# Altium PCB PowerDist.PcbDoc (part 2 of 2)
Units mm, origin at the board's own origin, x right, y up, seen from the top; angles counter-clockwise.
Board outline 126.62 x 74.17 mm, 2 copper layers (Top Layer, Bottom Layer); 124 components, 104 nets, 423 pads, 40 vias.
Unrouted connection lines stored in the file: 201.
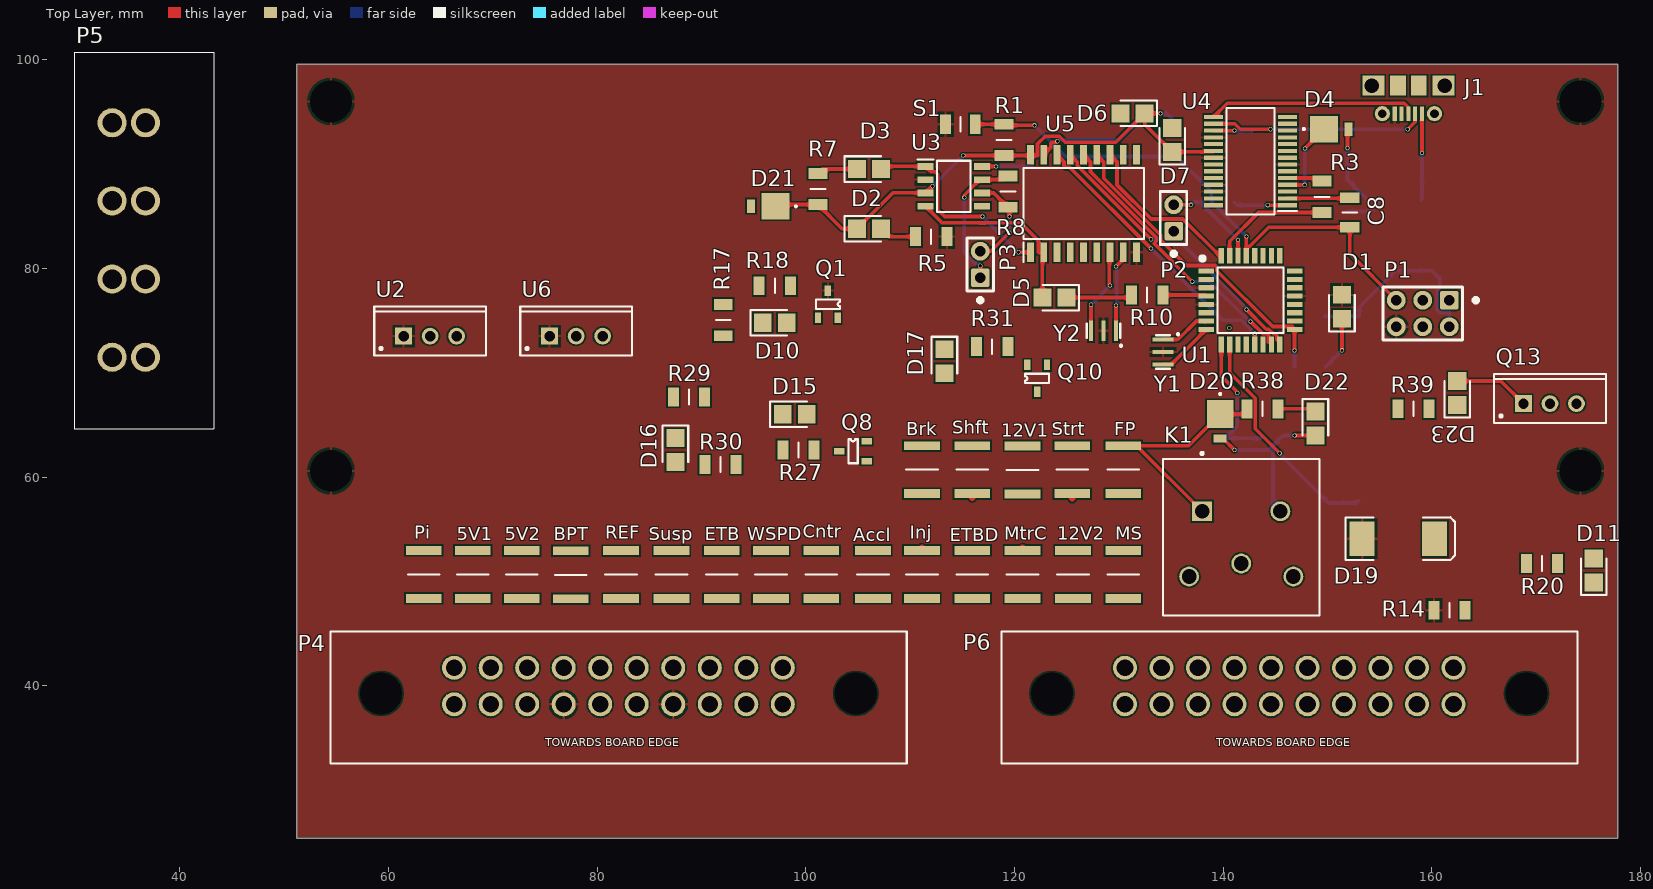
[diagram p0: Top Layer view]

## Part data (continued)
Pi: library part "Fuse 2", "Fuse", Case/Package=1812, Case Code (Metric)=4532, Current Rating=100A, Hold Current=500mA, Manufacturer=Bourns, Manufacturer Part Number=MF-MSMF050-2, Max Operating Temperature=85°C, Min Operating Temperature=-40°C, Operating Supply Voltage=15V, Package Quantity=2000, Power Dissipation=800mW, Resistance=150mR, Supplier Part Number=507-1881-2-ND, Trip Current=1A, Approvals=UL,CSA,TUV, Case Code (Imperial)=1812, ComponentLink1Description=https://datasheet.ciiva.com/326/mfmsmf-326354.pdf, ComponentLink1URL=https://datasheet.ciiva.com/326/mfmsmf-326354.pdf, ComponentLink2Description=https://datasheet.ciiva.com/1228/1786007-1228155.pdf, ComponentLink2URL=https://datasheet.ciiva.com/1228/1786007-1228155.pdf, ComponentLink3Description=https://datasheet.ciiva.com/16205/mfmsmf-16205994.pdf, ComponentLink3URL=https://datasheet.ciiva.com/16205/mfmsmf-16205994.pdf, ComponentLink4Description=https://datasheet.ciiva.com/34302/1164200-34302041.pdf, ComponentLink4URL=https://datasheet.ciiva.com/34302/1164200-34302041.pdf, ComponentLink5Description=https://datasheet.ciiva.com/14537/70153434-14537737.pdf, ComponentLink5URL=https://datasheet.ciiva.com/14537/70153434-14537737.pdf, ComponentLink6Description=https://datasheet.ciiva.com/46395/1695373-46395287.pdf, ComponentLink6URL=https://datasheet.ciiva.com/46395/1695373-46395287.pdf, ComponentLink7Description=https://datasheet.ciiva.com/22749/1695373-22749079.pdf, ComponentLink7URL=https://datasheet.ciiva.com/22749/1695373-22749079.pdf, ComponentLink8Description=https://datasheet.ciiva.com/32426/mf-msmf-series-eng-tds-32426126.pdf, ComponentLink8URL=https://datasheet.ciiva.com/32426/mf-msmf-series-eng-tds-32426126.pdf, ComponentLink9Description=https://datasheet.ciiva.com/4501/mfmsmf-72300-4501655.pdf, ComponentLink9URL=https://datasheet.ciiva.com/4501/mfmsmf-72300-4501655.pdf, ComponentLink10Description=https://datasheet.ciiva.com/3019/mfmsmf-3019622.pdf, ComponentLink10URL=https://datasheet.ciiva.com/3019/mfmsmf-3019622.pdf, ComponentLink11Description=https://datasheet.ciiva.com/3019/mfmsmf-3019621.pdf, ComponentLink11URL=https://datasheet.ciiva.com/3019/mfmsmf-3019621.pdf, ComponentLink12Description=https://datasheet.ciiva.com/326/mfmsmf-326356.pdf, ComponentLink12URL=https://datasheet.ciiva.com/326/mfmsmf-326356.pdf, ComponentLink13Description=https://datasheet.ciiva.com/1274/1786007-1274499.pdf, ComponentLink13URL=https://datasheet.ciiva.com/1274/1786007-1274499.pdf, ComponentLink14Description=https://datasheet.ciiva.com/326/mfmsmf-326355.pdf, ComponentLink14URL=https://datasheet.ciiva.com/326/mfmsmf-326355.pdf, ComponentLink15Description=https://datasheet.ciiva.com/1274/1786007-1274498.pdf, ComponentLink15URL=https://datasheet.ciiva.com/1274/1786007-1274498.pdf, ComponentLink16Description=https://datasheet.ciiva.com/15226/getdatasheetpartid-117168-15226886.pdf, ComponentLink16URL=https://datasheet.ciiva.com/15226/getdatasheetpartid-117168-15226886.pdf, ComponentLink17Description=https://datasheet.ciiva.com/25894/mfmsmf-25894175.pdf, ComponentLink17URL=https://datasheet.ciiva.com/25894/mfmsmf-25894175.pdf, Contact Plating=Gold, Height=0.85mm, LatestRevisionDate=17-Jul-2002, LatestRevisionNote="Re-released for DXP Platform.", Lead Free="Lead Free", Length=4.73mm, Max Current Rating=100A, Mount="Surface Mount,PCB", Number of Terminals=2, PackageDescription="Thru-Hole; 2 Leads", PackageReference=PIN-W2/E2.8, Packaging="Tape and Reel", part number=MF-MSMF050-2, Pricing 1="2000=0.2898, 4000=0.28463, 6000=0.27945, 10000=0.2691 (USD)", Published=8-Jun-2000, Publisher="Altium Limited", Radiation Hardening=No, REACH SVHC="No SVHC", Stock 1=126000, Supplier 1=Digi-Key, Terminal Material=Gold, Termination=SMD/SMT, Time to Trip=0.15s, Voltage Rating=15V, Voltage Rating (DC)=15V, Width=3.41mm
Q1 Q2 Q5 Q6 Q7 Q11 Q12: "N-Channel MOSFET", Supplier Part Number 1=SSM3K329RLFCT-ND, LatestRevisionDate=17-Jul-2002, LatestRevisionNote="Re-released for DXP Platform.", PackageDescription="TO, Flat Index; 3 In-Line, Axial Leads; Body Dia. 4.6mm; Lead Dia. 0.5 mm (max)", PackageReference=E3, PackageVersion=1995/1996, Published=8-Jun-2000, Publisher="Altium Limited", Supplier 1=Digi-Key
Q3 Q4 Q8 Q9 Q10: "P-Channel MOSFET", Supplier Part Number 1=DMP3099L-7DICT-ND, LatestRevisionDate=17-Jul-2002, LatestRevisionNote="Re-released for DXP Platform.", PackageDescription="TO, Flat Index; 3 In-Line, Axial Leads; Body Dia. 4.6mm; Lead Dia. 0.5 mm (max)", PackageReference=E3, PackageVersion=1995/1996, Published=8-Jun-2000, Publisher="Altium Limited", Supplier 1=Digi-Key
Q13: "P-Channel MOSFET", Supplier Part Number 1=IRF4905PBF-ND, LatestRevisionDate=17-Jul-2002, LatestRevisionNote="Re-released for DXP Platform.", PackageDescription="TO, Flat Index; 3 In-Line, Axial Leads; Body Dia. 4.6mm; Lead Dia. 0.5 mm (max)", PackageReference=E3, PackageVersion=1995/1996, Published=8-Jun-2000, Publisher="Altium Limited", Supplier 1=Digi-Key
R1: library part Res1, "Resistor", Case/Package=1206, Case Code (Metric)=3216, Manufacturer="Stackpole Electronics", Manufacturer Part Number=RNCP1206FTD1K00, Max Operating Temperature=155°C, Max Power Dissipation=500mW, Min Operating Temperature=-55°C, Resistance=10kR, Supplier Part Number=RNCP1206FTD10K0CT-ND, Temperature Coefficient=100ppm/°C, Tolerance=1%, Case Code (Imperial)=1206, ComponentLink1Description=http://www.seielect.com/Catalog/SEI-rncp.pdf, ComponentLink1URL=http://www.seielect.com/Catalog/SEI-rncp.pdf, ComponentLink2Description=https://www.seielect.com/catalog/SEI-Packaging.pdf, ComponentLink2URL=https://www.seielect.com/catalog/SEI-Packaging.pdf, Composition="Thin Film", Contact Plating=Nickel,Tin,Matte, Height=0.024inch, Lead Free="Lead Free", Length=0.122inch, Mount="Surface Mount", Number of Terminations=2, Packaging="Tape and Reel", Pricing 1="1=0.1, 10=0.052, 100=0.0211, 1000=0.00949, 2500=0.00824 (USD)", Radiation Hardening=No, Stock 1=679, Supplier 1=Digi-Key, Width=0.059inch
R2 R3 R4 R5 R7 R10 R11 R12: library part Res1, "Resistor", Case/Package=1206, Case Code (Metric)=3216, Manufacturer="Stackpole Electronics", Manufacturer Part Number=RNCP1206FTD1K00, Max Operating Temperature=155°C, Max Power Dissipation=500mW, Min Operating Temperature=-55°C, Resistance=1kR, Supplier Part Number=RMCF1206FT1K00CT-ND, Temperature Coefficient=100ppm/°C, Tolerance=1%, Case Code (Imperial)=1206, ComponentLink1Description=http://www.seielect.com/Catalog/SEI-rncp.pdf, ComponentLink1URL=http://www.seielect.com/Catalog/SEI-rncp.pdf, ComponentLink2Description=https://www.seielect.com/catalog/SEI-Packaging.pdf, ComponentLink2URL=https://www.seielect.com/catalog/SEI-Packaging.pdf, Composition="Thin Film", Contact Plating=Nickel,Tin,Matte, Height=0.024inch, Lead Free="Lead Free", Length=0.122inch, Mount="Surface Mount", Number of Terminations=2, Packaging="Tape and Reel", Pricing 1="1=0.1, 10=0.052, 100=0.0211, 1000=0.00949, 2500=0.00824 (USD)", Radiation Hardening=No, Stock 1=679, Supplier 1=Digi-Key, Width=0.059inch
R6: library part Res1, "Resistor", Case/Package=1206, Case Code (Metric)=3216, Manufacturer="TE Connectivity Holsworthy", Manufacturer Part Number=CRGH1206F16K9, Max Operating Temperature=125°C, Min Operating Temperature=-55°C, Number of Resistors=1, Power Rating=500mW, Resistance=16.9kR, Supplier Part Number=RMCF1206FT16K9CT-ND, Temperature Coefficient=100ppm/°C, Tolerance=1%, Voltage Rating=200V, Case Code (Imperial)=1206, ComponentLink1Description=https://datasheet.ciiva.com/12573/eng-ds-1773204-g-12573853.pdf, ComponentLink1URL=https://datasheet.ciiva.com/12573/eng-ds-1773204-g-12573853.pdf, Composition="Thick Film,Power resistor", ELV=Compliant, Height=0.55mm, Length=3.1mm, Mount="Surface Mount", Number of Terminations=2, Packaging="Tape and Reel", Supplier 1=Digi-Key, Termination=Solder, Width=1.55mm
R8: library part Res1, "Resistor", Case/Package=1206, Case Code (Metric)=3216, Manufacturer=Vishay, Manufacturer Part Number=CRCW1206120RFKEAHP, Max Operating Temperature=155°C, Min Operating Temperature=-55°C, Package Quantity=5000, Power Rating=500mW, Resistance=120R, Temperature Coefficient=100ppm/°C, Tolerance=1%, Voltage Rating=200V, Case Code (Imperial)=1206, ComponentLink1Description=https://datasheet.ciiva.com/8976/crcwhpe3-8976135.pdf, ComponentLink1URL=https://datasheet.ciiva.com/8976/crcwhpe3-8976135.pdf, ComponentLink2Description=https://datasheet.ciiva.com/48525/crcwhpe3-48525463.pdf, ComponentLink2URL=https://datasheet.ciiva.com/48525/crcwhpe3-48525463.pdf, ComponentLink3Description=https://datasheet.ciiva.com/7777/424479-7777433.pdf, ComponentLink3URL=https://datasheet.ciiva.com/7777/424479-7777433.pdf, ComponentLink4Description=https://datasheet.ciiva.com/7777/424479-7777434.pdf, ComponentLink4URL=https://datasheet.ciiva.com/7777/424479-7777434.pdf, Composition="Thick Film", Contact Plating=Tin, Depth=1.6mm, Height=0.5mm, Lead Free="Lead Free", Length=3.1mm, Military Standard=Not, Packaging="Tape and Reel", Radiation Hardening=No, REACH SVHC=Unknown, Stock 1=0, Supplier 1=Digi-Key, Supplier 2=Digi-Key, Termination=SMD/SMT, Voltage Rating (DC)=200V, Weight=0.000353oz, Width=1.6mm
R9: library part Res1, "Resistor", Case/Package=1206, Case Code (Metric)=3216, Manufacturer="Stackpole Electronics", Manufacturer Part Number=RNCP1206FTD10K0, Max Operating Temperature=155°C, Max Power Dissipation=500mW, Min Operating Temperature=-55°C, Resistance=10kR, Supplier Part Number=RNCP1206FTD10K0CT-ND, Temperature Coefficient=100ppm/°C, Tolerance=1%, Case Code (Imperial)=1206, ComponentLink1Description=http://www.seielect.com/Catalog/SEI-rncp.pdf, ComponentLink1URL=http://www.seielect.com/Catalog/SEI-rncp.pdf, Composition="Thin Film", Height=0.024inch, Length=0.122inch, Mount="Surface Mount", Number of Terminations=2, Packaging="Tape and Reel", Pricing 1="1=0.1, 10=0.052, 100=0.0211, 1000=0.00949, 2500=0.00824 (USD)", Stock 1=41487, Supplier 1=Digi-Key, Width=0.059inch
R13 R14 R18 R20 R21 R22 R23 R28 R30 R32: library part Res1, "Resistor", Supplier Part Number 1=RHM1.0MPCT-ND, LatestRevisionDate=17-Jul-2002, LatestRevisionNote="Re-released for DXP Platform.", PackageDescription="Axial Device, Thru-Hole; 2 Leads; 0.3 in Pin Spacing", PackageReference=AXIAL-0.3, Published=8-Jun-2000, Publisher="Altium Limited", Supplier 1=Digi-Key
R15 R16 R24: library part Res1, "Resistor", Case/Package=1206, Case Code (Metric)=3216, Manufacturer="Stackpole Electronics", Manufacturer Part Number=RNCP1206FTD1K00, Max Operating Temperature=155°C, Max Power Dissipation=500mW, Min Operating Temperature=-55°C, Resistance=10kR, Supplier Part Number=RNCP1206FTD1K00CT-ND, Temperature Coefficient=100ppm/°C, Tolerance=1%, Case Code (Imperial)=1206, ComponentLink1Description=http://www.seielect.com/Catalog/SEI-rncp.pdf, ComponentLink1URL=http://www.seielect.com/Catalog/SEI-rncp.pdf, ComponentLink2Description=https://www.seielect.com/catalog/SEI-Packaging.pdf, ComponentLink2URL=https://www.seielect.com/catalog/SEI-Packaging.pdf, Composition="Thin Film", Contact Plating=Nickel,Tin,Matte, Height=0.024inch, Lead Free="Lead Free", Length=0.122inch, Mount="Surface Mount", Number of Terminations=2, Packaging="Tape and Reel", Pricing 1="1=0.1, 10=0.052, 100=0.0211, 1000=0.00949, 2500=0.00824 (USD)", Radiation Hardening=No, Stock 1=679, Supplier 1=Digi-Key, Width=0.059inch
R17 R19 R27 R29 R31 R38 R39: library part Res1, "Resistor", Supplier Part Number 1=RNCP1206FTD511RCT-ND, LatestRevisionDate=17-Jul-2002, LatestRevisionNote="Re-released for DXP Platform.", PackageDescription="Axial Device, Thru-Hole; 2 Leads; 0.3 in Pin Spacing", PackageReference=AXIAL-0.3, Published=8-Jun-2000, Publisher="Altium Limited", Supplier 1=Digi-Key
R35: library part Res1, "Resistor", Supplier Part Number 1=RG3216P-1004-B-T1, LatestRevisionDate=17-Jul-2002, LatestRevisionNote="Re-released for DXP Platform.", PackageDescription="Axial Device, Thru-Hole; 2 Leads; 0.3 in Pin Spacing", PackageReference=AXIAL-0.3, Published=8-Jun-2000, Publisher="Altium Limited", Supplier 1=Digi-Key
R36 R37: library part Res1, "Resistor", Supplier Part Number 1=RG32P1.0MBCT-ND, LatestRevisionDate=17-Jul-2002, LatestRevisionNote="Re-released for DXP Platform.", PackageDescription="Axial Device, Thru-Hole; 2 Leads; 0.3 in Pin Spacing", PackageReference=AXIAL-0.3, Published=8-Jun-2000, Publisher="Altium Limited", Supplier 1=Digi-Key
S1: "Switch", Manufacturer="ITT C&K", Manufacturer Part Number=KXT331LHS, Supplier Part Number=CKN10779CT-ND, ComponentLink1Description=https://www.ckswitches.com/media/1465/kxt3.pdf, ComponentLink1URL=https://www.ckswitches.com/media/1465/kxt3.pdf, ComponentLink2Description=http://www.ckswitches.com/media/1465/kxt3.pdf, ComponentLink2URL=http://www.ckswitches.com/media/1465/kxt3.pdf, LatestRevisionDate=17-Jul-2002, LatestRevisionNote="Re-released for DXP Platform.", PackageDescription="Switch; 2 Leads", PackageReference=SPST-2, Pricing 1="8500=0.1264 (USD)", Published=24-Mar-1999, Publisher="Altium Limited", Stock 1=42500, Supplier 1=Digi-Key
U1: "8-bit AVR Microcontroller, 32KB Flash, 1KB EEPROM, 2KB SRAM, 32-pin TQFP, Industrial Grade (-40°C to 85°C)", Supplier Part Number=ATMEGA328P-AU-ND, Code_JEDEC=MS-026-ABA, ComponentLink1Description="Manufacturer Link", ComponentLink1URL=http://www.atmel.com/products/avr/default.asp?, ComponentLink2Description="ATmega48A/48PA/88A/88PA/168A/168PA/328/328P Datasheet", ComponentLink2URL=http://www.atmel.com/dyn/resources/prod_documents/8271.pdf, ComponentLink3Description="ATmega48A/48PA/88A/88PA/168A/168PA/328/328P Summary", ComponentLink3URL=http://www.atmel.com/dyn/resources/prod_documents/8271S.pdf, ComponentLink4Description="Atmel.com Home", ComponentLink4URL=http://www.atmel.com, DatasheetVersion="revA, Jan-2010", PackageDescription="32-Lead, 7x7x1.0 mm Body, 0.8mm Lead Pitch, Thin Profile Plastic Quad Flat Package (TQFP)", PackageReference=32A, PackageVersion="revB, Oct-2001", Published=1-Apr-2010, Publisher="Altium Limited", Supplier 1=Digi-Key, Supplier 2=Farnell, Supplier 3=Mouser, Supplier Part Number 2=1715486, Supplier Part Number 3=556-ATMEGA328P-AU
U2 U6: "3A Low Dropout Positive Regulators, 3-pin TO-220, Pb-Free", Manufacturer="National Semiconductor", PackageTopMarking=NSUZXYTTE#*LM1085*IT-5.0, PowerWise=N, ComponentLink1Description="Manufacturer URL", ComponentLink1URL=http://www.national.com/, ComponentLink2Description="LM1085 Datasheet", ComponentLink2URL=http://www.national.com/ds/LM/LM1085.pdf, ComponentLink3Description="LM1085 Web Page", ComponentLink3URL=http://www.national.com/pf/LM/LM1085.html, ComponentLink4Description="T03B Package Page", ComponentLink4URL=http://www.national.com/packaging/folders/t03b.html, CompType="LDO IC", DatasheetVersion=Jun-2005, High-Reliability=Y, PackageDescription="TO-220, Molded, 3 Lead, Straight", PackageReference=T03B, PackageVersion="revL, Jan-1992", PartNumber=LM1085IT-5.0/NOPB, PinCount=3, RoHS=Y
U3: "SOIC", Supplier Part Number=MCP2551T-E/SNCT-ND, Supplier 1=Digi-Key
U4: "USB UART Asynchronous Serial Data Transfer Chip, SSOP-28, Tape and Reel", Case/Package=SSOP, Manufacturer=FTDI, Manufacturer Part Number=FT232RL-REEL, Max Operating Temperature=85°C, Max Supply Voltage=5.25V, Min Operating Temperature=-40°C, Min Supply Voltage=3.3V, Operating Supply Current=15mA, Package Quantity=2000, Supplier Part Number=768-1007-1-ND, Voltage=5V, ComponentLink1Description="Manufacturer Link", ComponentLink1URL=http://www.ftdichip.com/Products/ICs/FT232R.htm, ComponentLink2Description=Datasheet, ComponentLink2URL=http://www.ftdichip.com/Support/Documents/DataSheets/ICs/DS_FT232R.pdf, ComponentLink3Description=https://datasheet.ciiva.com/34304/2161019-34304054.pdf, ComponentLink3URL=https://datasheet.ciiva.com/34304/2161019-34304054.pdf, ComponentLink4Description=https://datasheet.ciiva.com/1787/ds-ft232r-1787047.pdf, ComponentLink4URL=https://datasheet.ciiva.com/1787/ds-ft232r-1787047.pdf, ComponentLink5Description=https://datasheet.ciiva.com/1787/ds-ft232r-1787048.pdf, ComponentLink5URL=https://datasheet.ciiva.com/1787/ds-ft232r-1787048.pdf, ComponentLink6Description=https://datasheet.ciiva.com/1787/ds-ft232r-1787049.pdf, ComponentLink6URL=https://datasheet.ciiva.com/1787/ds-ft232r-1787049.pdf, ComponentLink7Description=https://datasheet.ciiva.com/4787/ds-ft232r-11534-4787658.pdf, ComponentLink7URL=https://datasheet.ciiva.com/4787/ds-ft232r-11534-4787658.pdf, ComponentLink8Description=https://datasheet.ciiva.com/15150/getdatasheetpartid-643207-15150506.pdf, ComponentLink8URL=https://datasheet.ciiva.com/15150/getdatasheetpartid-643207-15150506.pdf, ComponentLink9Description=https://datasheet.ciiva.com/16200/ds-ft232r-16200652.pdf, ComponentLink9URL=https://datasheet.ciiva.com/16200/ds-ft232r-16200652.pdf, ComponentLink10Description=https://datasheet.ciiva.com/26841/ft232rl-reel-26841080.pdf, ComponentLink10URL=https://datasheet.ciiva.com/26841/ft232rl-reel-26841080.pdf, Data Rate=12Mbps, DatasheetVersion="ver 2.07, Jul-2010", Height=1.75mm, Interface=RS-232,RS-422,RS-485,UART, Lead Free="Lead Free", Length=10.2mm, Mount="Surface Mount", Number of Channels=1, Number of Pins=28, Number of Transceivers=1, PackageDescription="28-Pin Small Outline Package 0.65 mm Pitch", PackageReference=SSOP-28, PackageVersion=2010, Packaging="Tape and Reel", Pricing 1="1=4.5, 10=4.05, 100=3.65, 250=3.25, 500=2.85002, 1000=2.65 (USD)", Published=19-Aug-2010, Publisher="Altium Limited", Radiation Hardening=No, REACH SVHC="No SVHC", Stock 1=216496, Supplier 1=Digi-Key, Supplier 2=Digi-Key, Weight=0.080001oz, Width=5.3mm
U5: "SOIC", Supplier Part Number=MCP2515T-I/SOCT-ND, Supplier 1=Digi-Key
Y1 Y2: Capacitance=15pF, Case/Package=SMD/SMT, Frequency=16MHz, Frequency Stability=0.15%, Frequency Tolerance=0.5%, Manufacturer=Murata, Manufacturer Part Number=CSTCE16M0V53C-R0, Max Operating Temperature=125°C, Min Operating Temperature=-40°C, Package Quantity=3000, Supplier Part Number=490-17948-1-ND, ComponentLink1Description=https://datasheet.ciiva.com/16430/cstce16m0v53c-r0-16430704.pdf, ComponentLink1URL=https://datasheet.ciiva.com/16430/cstce16m0v53c-r0-16430704.pdf, ComponentLink2Description=https://datasheet.ciiva.com/14132/ceralock-eng-bro-14132709.pdf, ComponentLink2URL=https://datasheet.ciiva.com/14132/ceralock-eng-bro-14132709.pdf, ComponentLink3Description=https://datasheet.ciiva.com/29617/l0430e-29617948.pdf, ComponentLink3URL=https://datasheet.ciiva.com/29617/l0430e-29617948.pdf, ComponentLink4Description=https://datasheet.ciiva.com/29617/l0430e-29617949.pdf, ComponentLink4URL=https://datasheet.ciiva.com/29617/l0430e-29617949.pdf, ComponentLink5Description=https://datasheet.ciiva.com/29617/l0430e-29617950.pdf, ComponentLink5URL=https://datasheet.ciiva.com/29617/l0430e-29617950.pdf, ComponentLink6Description=https://datasheet.ciiva.com/26812/getdatasheetpartid-418508-26812063.pdf, ComponentLink6URL=https://datasheet.ciiva.com/26812/getdatasheetpartid-418508-26812063.pdf, Composition=Ceramic, Contact Plating=Gold, Height=0.031inch, Lead Free="Lead Free", Length=0.126inch, Mount="Surface Mount", Number of Pins=3, Packaging="Tape and Reel", REACH SVHC="No SVHC", Stock 1=0, Supplier 1=Digi-Key, Termination=SMD/SMT, Tolerance=0.5%, Width=0.051inch

## Free pads (board coordinates)
  round 1.524 hole 4: 2(174.244,96.012) 3(54.483,96.012) 4(174.244,60.606) 5(54.483,60.606)

## Via types
v1: diameter 0.4, hole 0.3, Top Layer to Bottom Layer, 39 vias
v2: diameter 0.4, hole 0.3, Top Layer to Bottom Layer, tented both sides, 1 vias

## Nets (pads, with @x,y where several pads share a name; then routed paths per layer and width w, separated by ;. In a path a pad name is that pad's centre, name@x,y a point inside that pad or via, vN(x,y) a via of type N, cw(c..) or ccw(c..) an arc to the next point about the centre after c; other vN are vias at no path point)
5VOut: 5V1.1 5V2.1 Accl.1 BPT.1 C4.1 Cntr.1 ETB.1 REF.1 Susp.1 U6.2 WSPD.1
+3.3V: C7.2 U4.17 | length 3.7
  Top Layer w0.35: U4.17 v1(141.097,93.222)
  Bottom Layer w0.35: v1(141.097,93.222) 142.64,93.222 C7.2
+5V: C1.1 C2.2 C5.2 C6.2 D2.1 D4.2 D6.1 D7.1 D21.2 P1.4 R1.1 R7.1 R9.2 R10.2 U1.4 U1.6 U1.18 U3.3 U4.4 U4.20 U5.18 | length 85.2
  Top Layer w0.35: D21.2 97.244,86.13 R7.1 103.468,83.82 D2.1 108.324,87.249 U3.3 112.096,87.884 v1(112.141,87.884) ; v1(115.086,90.829) R1.1 122.209,90.829 122.209,91.947 122.939,92.677 124.3,92.677 124.869,92.108 129.707,92.108 D6.1 ; v1(133.985,94.869) D6.1 ; R10.2 138.263,77.47 U1.4 ; U4.20 138.978,91.179 D7.1 132.468,93.839 D6.1 ; U4.4 v1(147.817,88.022) ; v1(147.828,91.504) D4.2
  Bottom Layer w0.35: v1(112.141,87.884) v1(115.086,90.829) ; v1(133.985,94.869) 134.596,94.869 R9.2 ; v1(147.817,88.022) 147.817,91.238 147.955,91.376 v1(147.828,91.504) ; C1.1 C2.2 153.035,76.282 C6.2 C5.2 160.789,79.023 160.789,78.137 160.496,77.844 160.496,76.08 160.789,75.787 161.671,75.787 P1.4
ADC0: U1.23
ADC1: U1.24
ADC2: U1.25
ADC3: U1.26
ADC4: U1.27
ADC5: U1.28
ADC6: U1.19
ADC7: U1.22
CANH: P3.1 R8.1 U3.7 | length 13.6
  Top Layer w0.35: v1(115.189,86.823) 115.189,87.029 116.679,88.519 U3.7 119.027,88.519 R8.1 ; P3.1 v1(116.713,80.264)
  Bottom Layer w0.35: v1(115.189,86.823) 115.189,81.523 116.226,80.486 116.491,80.486 v1(116.713,80.264)
CANL: P3.2 R8.2 U3.6 | length 9.1
  Top Layer w0.35: P3.2 117.729,81.661 v1(119.507,83.439) ; U3.6 118.003,87.249 R8.2 119.507,85.745 v1(119.507,84.991)
  Bottom Layer w0.35: v1(119.507,83.439) v1(119.507,84.991)
CBRB: ETBD.1 Inj.1 MS.1 MtrC.1 P4.10 P4.20 P6.16 P6.18 Shft.1 Strt.1 | length 1.3
  Top Layer w0.65: Inj.1 Inj.1@111.125,53.213 ; Shft.1@115.951,58.039 Shft.1 ; MtrC.1 MtrC.1@120.777,53.213 ; 125.537,57.973 Strt.1
D0/RXD: P2.2 R2.1 U1.30 | length 9.5
  Top Layer w0.35: P2.2 v1(136.906,86.106) ; U1.30 v1(141.421,82.734)
  Bottom Layer w0.35: v1(136.906,86.106) 137.16,86.36 R2.1 138.073,86.082 v1(141.421,82.734)
D1/TXD: P2.1 R3.1 U1.31 | length 11.4
  Top Layer w0.35: U1.31 140.621,82.606 143.383,85.368 R3.1
D2/INTCAN: U1.32 U5.12 | length 16
  Top Layer w0.35: U5.12 129.829,90.238 129.829,88.016 133.104,84.741 136.137,84.741 139.666,81.212 U1.32
D9/CS: U1.13 U5.16 | length 27.3
  Top Layer w0.35: U5.16 124.749,90.238 124.749,89.869 124.91,89.708 125.279,89.708 v1(133.072,81.915) ; U1.13 v1(143.021,73.768)
  Bottom Layer w0.35: v1(133.072,81.915) 139.93,75.057 141.732,75.057 v1(143.021,73.768)
D11/MOSI: P1.5 U1.15 U5.14 | length 27.3
  Top Layer w0.35: U5.14 127.289,90.238 127.289,89.283 133.571,83.001 133.571,82.607 133.382,82.418 133.382,82.391 v1(137.033,78.74) ; v1(142.621,74.93) 143.814,73.737 144.185,73.737 144.346,73.576 144.346,72.93 144.621,72.93 U1.15
  Bottom Layer w0.35: v1(137.033,78.74) 138.685,78.74 142.391,75.034 142.621,75.034 v1(142.621,74.93)
D12/MISO: P1.1 U1.16 U5.15 | length 28.1
  Top Layer w0.35: U5.15 126.019,90.238 126.019,89.869 132.6,83.288 132.612,83.288 v1(133.096,82.804) ; v1(142.24,76.073) 144.126,74.187 144.371,74.187 144.796,73.762 144.796,73.737 144.985,73.737 145.146,73.576 145.146,73.167 U1.16@145.421,72.892
  Bottom Layer w0.35: v1(133.096,82.804) 133.96,82.804 134.373,82.391 136.049,82.391 142.24,76.2 v1(142.24,76.073)
D13/SCK: P1.2 R4.2 U1.17 U5.13 | length 30.9
  Top Layer w0.35: U5.13 128.559,90.238 128.559,88.649 134.021,83.187 134.021,82.743 136.477,80.287 139.235,80.287 139.396,80.126 139.396,79.799 144.758,74.437 146.596,74.437 U1.17 146.836,74.127 v1(146.836,72.136)
  Bottom Layer w0.35: R4.2 v1(146.836,72.136)
GND: C1.2 C2.1 C3.1 C4.2 C5.1 C6.1 C7.1 C9.1 C10.1 C11.2 C12.2 C13.2 C14.2 C15.2 C16.2 D1.2 D8.1 D9.1 D12.1 D13.1 D14.1 D19.1 J1.5 P1.6 P4.14 P4.17 pad.2 pad.3 pad.4 pad.5 Q1.3 Q2.3 Q5.3 Q6.3 Q7.3 Q11.3 Q12.3 R5.2 R6.1 R13.1 R14.1 R15.1 R16.1 R21.1 R22.1 R23.1 R24.1 R35.1 R36.1 S1.2 U1.3 U1.5 U1.21 U2.1 U3.2 U4.7 U4.18 U4.21 U4.25 U4.26 U5.9 U6.1 Y1.2 Y2.2
Net5VSpr1_2: 5V1.2 P4.2
Net5VSpr2_2: 5V2.2 P4.12
Net12VSpr1_1: 12V1.1 Q8.3 R27.1 R28.2
Net12VSpr2_1: 12V2.1 P6.9
NetACCL_2: Accl.2 P4.15 P4.16
NetBPT_2: BPT.2 P4.4
NetBRKLTVIN_1: Brk.1 Q10.3 R31.1 R32.2
NetC3_2: C3.2 U1.20
NetC8_1: C8.1 U4.2 | length 6
  Top Layer w0.35: U4.2 152.08,86.722 C8.1
NetC11_1: C11.1 D8.2 P6.1 Q3.1@104.582,75.408 R15.2
NetC12_1: C12.1 D9.2 P6.19 Q4.1@166.436,48.798 R16.2
NetC13_1: C13.1 C15.1 P4.3 U2.3 U6.3
NetC14_1: C14.1 D12.2 P6.7 Q8.1@105.821,61.534 R24.2
NetCntrllr_2: Cntr.2 D21.1
NetD1_1: D1.1 R4.1 | length 5.2
  Top Layer w0.35: v1(151.384,72.16) D1.1
  Bottom Layer w0.35: R4.1 v1(151.384,72.16)
NetD2_2: D2.2 R5.1 | length 3.6
  Top Layer w0.35: D2.2 107.957,83.058 R5.1
NetD3_1: D3.1 R7.2 | length 3.9
  Top Layer w0.35: R7.2 101.563,89.535 D3.1
NetD3_2: D3.2 U3.1 U5.1 | length 19.8
  Top Layer w0.35: D3.2 107.456,89.789 U3.1 111.977,89.273 112.401,89.273 112.653,89.022 112.653,85.642 113.303,84.991 v1(116.939,84.991) ; v1(120.372,81.558) U5.1
  Bottom Layer w0.35: v1(116.939,84.991) v1(120.372,81.558)
NetD5_1: D5.1 R10.1 | length 6.7
  Top Layer w0.35: D5.1@125.229,77.47 D5.1 130.961,77.216 R10.1
NetD5_2: D5.2 U3.4 U5.2 | length 18.2
  Top Layer w0.35: U3.4 113.053,84.387 116.653,84.387 116.678,84.362 117.2,84.362 117.225,84.387 120.567,84.387 122.293,82.661 122.293,81.558 U5.2 122.675,81.424 D5.2
NetD6_2: D6.2 R11.2
NetD7_2: D7.2 R12.2
NetD10_1: D10.1 R17.2
NetD10_2: D10.2 Q1.1@101.158,75.281 Q3.2 R18.1
NetD11_1: D11.1 R19.2
NetD11_2: D11.2 Q2.1@172.146,51.786 Q4.2 R20.1
NetD13_2: D13.2 P6.5 Q9.1@96.586,63.276
NetD14_2: D14.2 P6.4 Q10.1@123.124,70.769
NetD15_1: D15.1 R27.2
NetD15_2: D15.2 Q5.1@103.063,65.054 Q8.2 R28.1
NetD16_1: D16.1 R29.2
NetD16_2: D16.2 Q6.1@90.013,65.725 Q9.2 R30.1
NetD17_1: D17.1 R31.2
NetD17_2: D17.2 Q7.1@120.971,73.853 Q10.2 R32.1
NetD19_2: D19.2 P6.6 Q13.2
NetD20_1: D20.1 D22.2 K1.2 Q11.1@145.476,63.724 | length 17.2
  Top Layer w0.35: D20.1 140.004,63.689 v1(141.082,62.611) ; v1(146.852,64.001) D22.2
  Bottom Layer w0.35: v1@141.073,62.611 v1(141.082,62.611) 144.363,62.611 144.78,63.028 ; K1.2 144.78,56.729 144.78,63.028 ; v1(146.852,64.001) 145.753,64.001 145.476,63.724 144.78,63.028
NetD20_2: D20.2 FP.1 K1.1 R38.1 | length 22.2
  Top Layer w0.35: FP.1 FP.1@131.691,63.02 ; K1.1 FP.1@131.691,63.02 ; R38.1 141.756,66.04 D20.2 136.68,63.02 FP.1@131.691,63.02
NetD22_1: D22.1 R38.2 | length 3.7
  Top Layer w0.35: R38.2 148.597,66.548 D22.1
NetD23_1: D23.1 R39.2
NetD23_2: D23.2 Q12.1@154.874,57.755 Q13.1 R37.1 | length 7.2
  Top Layer w0.35: D23.2 166.617,69.222 Q13.1
NetETB_2: ETB.2 P6.2
NetETBDrv_2: ETBD.2 P6.14
NetF1_2: F1.2 J1.1 | length 8.2
  Top Layer w0.35: v1(159.05,91.059) J1.1
  Bottom Layer w0.35: F1.2 159.05,86.679 v1(159.05,91.059)
NetInj_2: Inj.2 P6.12
NetK1_3: K1.3 P6.3
NetK1_5: K1.5 P6.8
"NetMABX REF_2": P4.11 REF.2
NetMS_2: MS.2 P6.10
"NetMtr Cntrl_2": MtrC.2 P6.13
NetP4_1: P4.1 Pi.2
NetP4_5: P4.5 P4.6 Susp.2
NetP4_8: P4.8 P4.9 P4.18 P4.19 WSPD.2
NetP5_1: P5.1
NetP5_2: P5.2
NetP5_3: P5.3
NetP5_4: P5.4
NetP6_11: P6.11 Q13.3 R37.2 R39.1
NetQ3_3: Q3.3 Q4.3 R17.1 R18.2 R19.1 R20.2 Shft.2
NetQ9_3: Q9.3 R29.1 R30.2 Strt.2
NetR6_2: R6.2 U3.8 | length 4.8
  Top Layer w0.35: U3.8 116.889,89.793 v1(118.233,89.793)
  Bottom Layer w0.35: v1(118.233,89.793) 121.591,89.793 R6.2
NetR9_1: R9.1 U5.17 | length 10.9
  Top Layer w0.35: U5.17 123.479,91.578 123.479,91.947 123.64,92.108 124.009,92.108 v1(124.103,92.202)
  Bottom Layer w0.35: v1(124.103,92.202) 124.244,92.343 130.086,92.343 R9.1
NetR11_1: R11.1 U4.23
NetR12_1: R12.1 U4.22
NetU1_7: U1.7 Y1.1 | length 5
  Top Layer w0.35: Y1.1 135.686,73.209 137.439,74.962 U1.7 U1.7@138.25,74.841
NetU1_8: U1.8 Y1.3 | length 5.5
  Top Layer w0.35: Y1.3 135.018,70.809 U1.8
NetU5_7: U5.7 Y2.3 | length 7.8
  Top Layer w0.35: Y2.3 v1(127.324,76.524) ; v1(129.159,78.359) 129.095,78.423 129.095,80.962 U5.7@129.159,81.026
  Bottom Layer w0.35: v1(127.324,76.524) v1(129.159,78.359)
NetU5_8: U5.8 Y2.1 | length 7.2
  Top Layer w0.35: Y2.1 v1(129.724,76.467) ; v1(129.724,80.194) U5.8@130.429,80.899
  Bottom Layer w0.35: v1(129.724,76.467) 129.788,76.531 129.788,80.13 v1(129.724,80.194)
PD3: Q2.2 R14.2 U1.1
PD4: Q1.2 R13.2 U1.2
PD5: Q11.2 R35.2 U1.9 | length 13.7
  Top Layer w0.35: U1.9 139.821,69.699 141.351,68.169 v1(141.351,68.082)
  Bottom Layer w0.35: R35.2 R35.2@140.178,63.724 ; v1(141.351,68.082) 141.361,68.072 141.361,64.907 R35.2@140.178,63.724 ; Q11.2 R35.2@140.178,63.724
PD6: Q12.2 R36.2 U1.10 | length 22.1
  Top Layer w0.35: U1.10 140.621,70.005 143.064,67.562 143.064,64.644 v1(145.415,62.293)
  Bottom Layer w0.35: v1(145.415,62.293) 145.415,62.23 150.114,57.531 R36.2 152.75,57.531 Q12.2
PD7: Q7.2 R23.2 U1.11
PD8: Q6.2 R22.2 U1.12
PD10: Q5.2 R21.2 U1.14
PiReg: C16.1 Pi.1 U2.2
RBRB: 12V1.2 12V2.2 Brk.2 FP.2 P4.7 P4.13 P6.15 P6.17
RESET: C8.2 P1.3 R1.2 S1.1 U1.29 | length 52.5
  Top Layer w0.35: S1.1 R1.2 119.102,93.726 v1(121.92,93.726) ; U1.29 U1.29@142.221,81.801 ; v1(142.221,83.077) U1.29@142.221,81.801 ; P1.3 152.146,81.407 C8.2 144.368,83.948 U1.29@142.221,81.801
  Bottom Layer w0.35: v1(121.92,93.726) 121.907,93.726 124.89,90.743 135.504,90.743 138.873,87.374 138.873,86.425 v1(142.221,83.077)
RXD: R2.2 U4.1 | length 5.2
  Top Layer w0.35: v1(144.272,86.072) U4.1
  Bottom Layer w0.35: R2.2 141.361,86.072 v1(144.272,86.072)
TXD: R3.2 U4.5 | length 3.4
  Top Layer w0.35: U4.5 149.175,88.672 R3.2
USBD+: J1.3 U4.15 | length 20
  Top Layer w0.35: U4.15 140.385,95.836 157.364,95.836 157.75,95.45 J1.3
USBD-: J1.2 U4.16 | length 20.6
  Top Layer w0.35: U4.16 141.119,93.872 141.646,93.345 v1(144.526,93.345) ; v1(157.684,93.345) 158.4,94.061 J1.2
  Bottom Layer w0.35: v1(144.526,93.345) v1(157.684,93.345)
VUSB: C9.2 C10.2 D4.1 F1.1 | length 12.7
  Top Layer w0.35: v1(151.915,91.544) 151.915,93.239 D4.1
  Bottom Layer w0.35: C9.2 154.042,85.471 F1.1 153.82,86.614 C10.2 v1(151.915,91.544)
pads on no net: J1.0 J1.4 K1.4 P4.21 P4.22 P6.20 P6.21 P6.22 Q1.1@103.608,77.131 Q2.1@169.696,53.636 Q3.1@102.132,77.258 Q4.1@168.886,46.948 Q5.1@105.513,63.204 Q6.1@91.863,68.175 Q7.1@122.821,76.303 Q8.1@103.971,63.984 Q9.1@99.036,61.426 Q10.1@120.674,68.919 Q11.1@143.026,65.574 Q12.1@152.424,59.605 U3.5 U4.3 U4.6 U4.8 U4.9 U4.10 U4.11 U4.12 U4.13 U4.14 U4.19 U4.24 U4.27 U4.28 U5.3 U5.4 U5.5 U5.6 U5.10 U5.11
copper on no net:
  other v2: 140.58,74.306

## Polygon pours and split planes (outlines as drawn)
GND on Top Layer "Top Layer-GND" (solid, pour order 4): 177.8,99.441 177.673,99.568 51.181,99.568 51.181,25.273 51.435,25.527 177.8,25.527
no net on Top Layer "Top Layer-No Net" (solid, pour order 0): 49.276,125.857
GND on Bottom Layer "Bottom Layer-GND" (solid, pour order 6): 51.181,99.568 51.308,99.441 51.308,25.4 177.673,25.4 177.8,25.527 177.673,25.654 177.673,99.568

## Text inside footprints (layer, text, board x,y; h text height)
D8: Mechanical 13 "*" at 114.554,80.556 h1.27 r90; Bottom Overlay "*" at 114.554,82.047 h1.27 r90
D9: Mechanical 13 "*" at 160.495,51.181 h1.27 r180; Bottom Overlay "*" at 159.004,51.181 h1.27 r180
D12: Mechanical 13 "*" at 116.205,64.988 h1.27 r90; Bottom Overlay "*" at 116.205,66.479 h1.27 r90
D13: Mechanical 13 "*" at 98.359,68.925 h1.27 r90; Bottom Overlay "*" at 98.359,70.416 h1.27 r90
D14: Mechanical 13 "*" at 129.43,69.596 h1.27; Bottom Overlay "*" at 130.921,69.596 h1.27
P4: Top Overlay "TOWARDS BOARD EDGE" at 75.04,34.2 h0.76
P6: Top Overlay "TOWARDS BOARD EDGE" at 139.332,34.2 h0.76